# Altium PCB Lite Carrier for Mu.PcbDoc (part 6 of 15)
Units mm, origin at the board's own origin, x right, y up, seen from the top; angles counter-clockwise.
Board outline 146 x 102 mm, 20 copper layers (F.Cu, F.Mask, B.Cu, B.Mask, In1.Cu, F.SilkS, In2.Cu, B.SilkS, F.Adhes, B.Adhes, F.Paste, B.Paste, Dwgs.User, Cmts.User, Eco1.User, Eco2.User, Edge.Cuts, Margin, B.CrtYd, F.CrtYd); 254 components, 382 nets, 1258 pads, 1020 vias.
Unrouted connection lines stored in the file: 113.
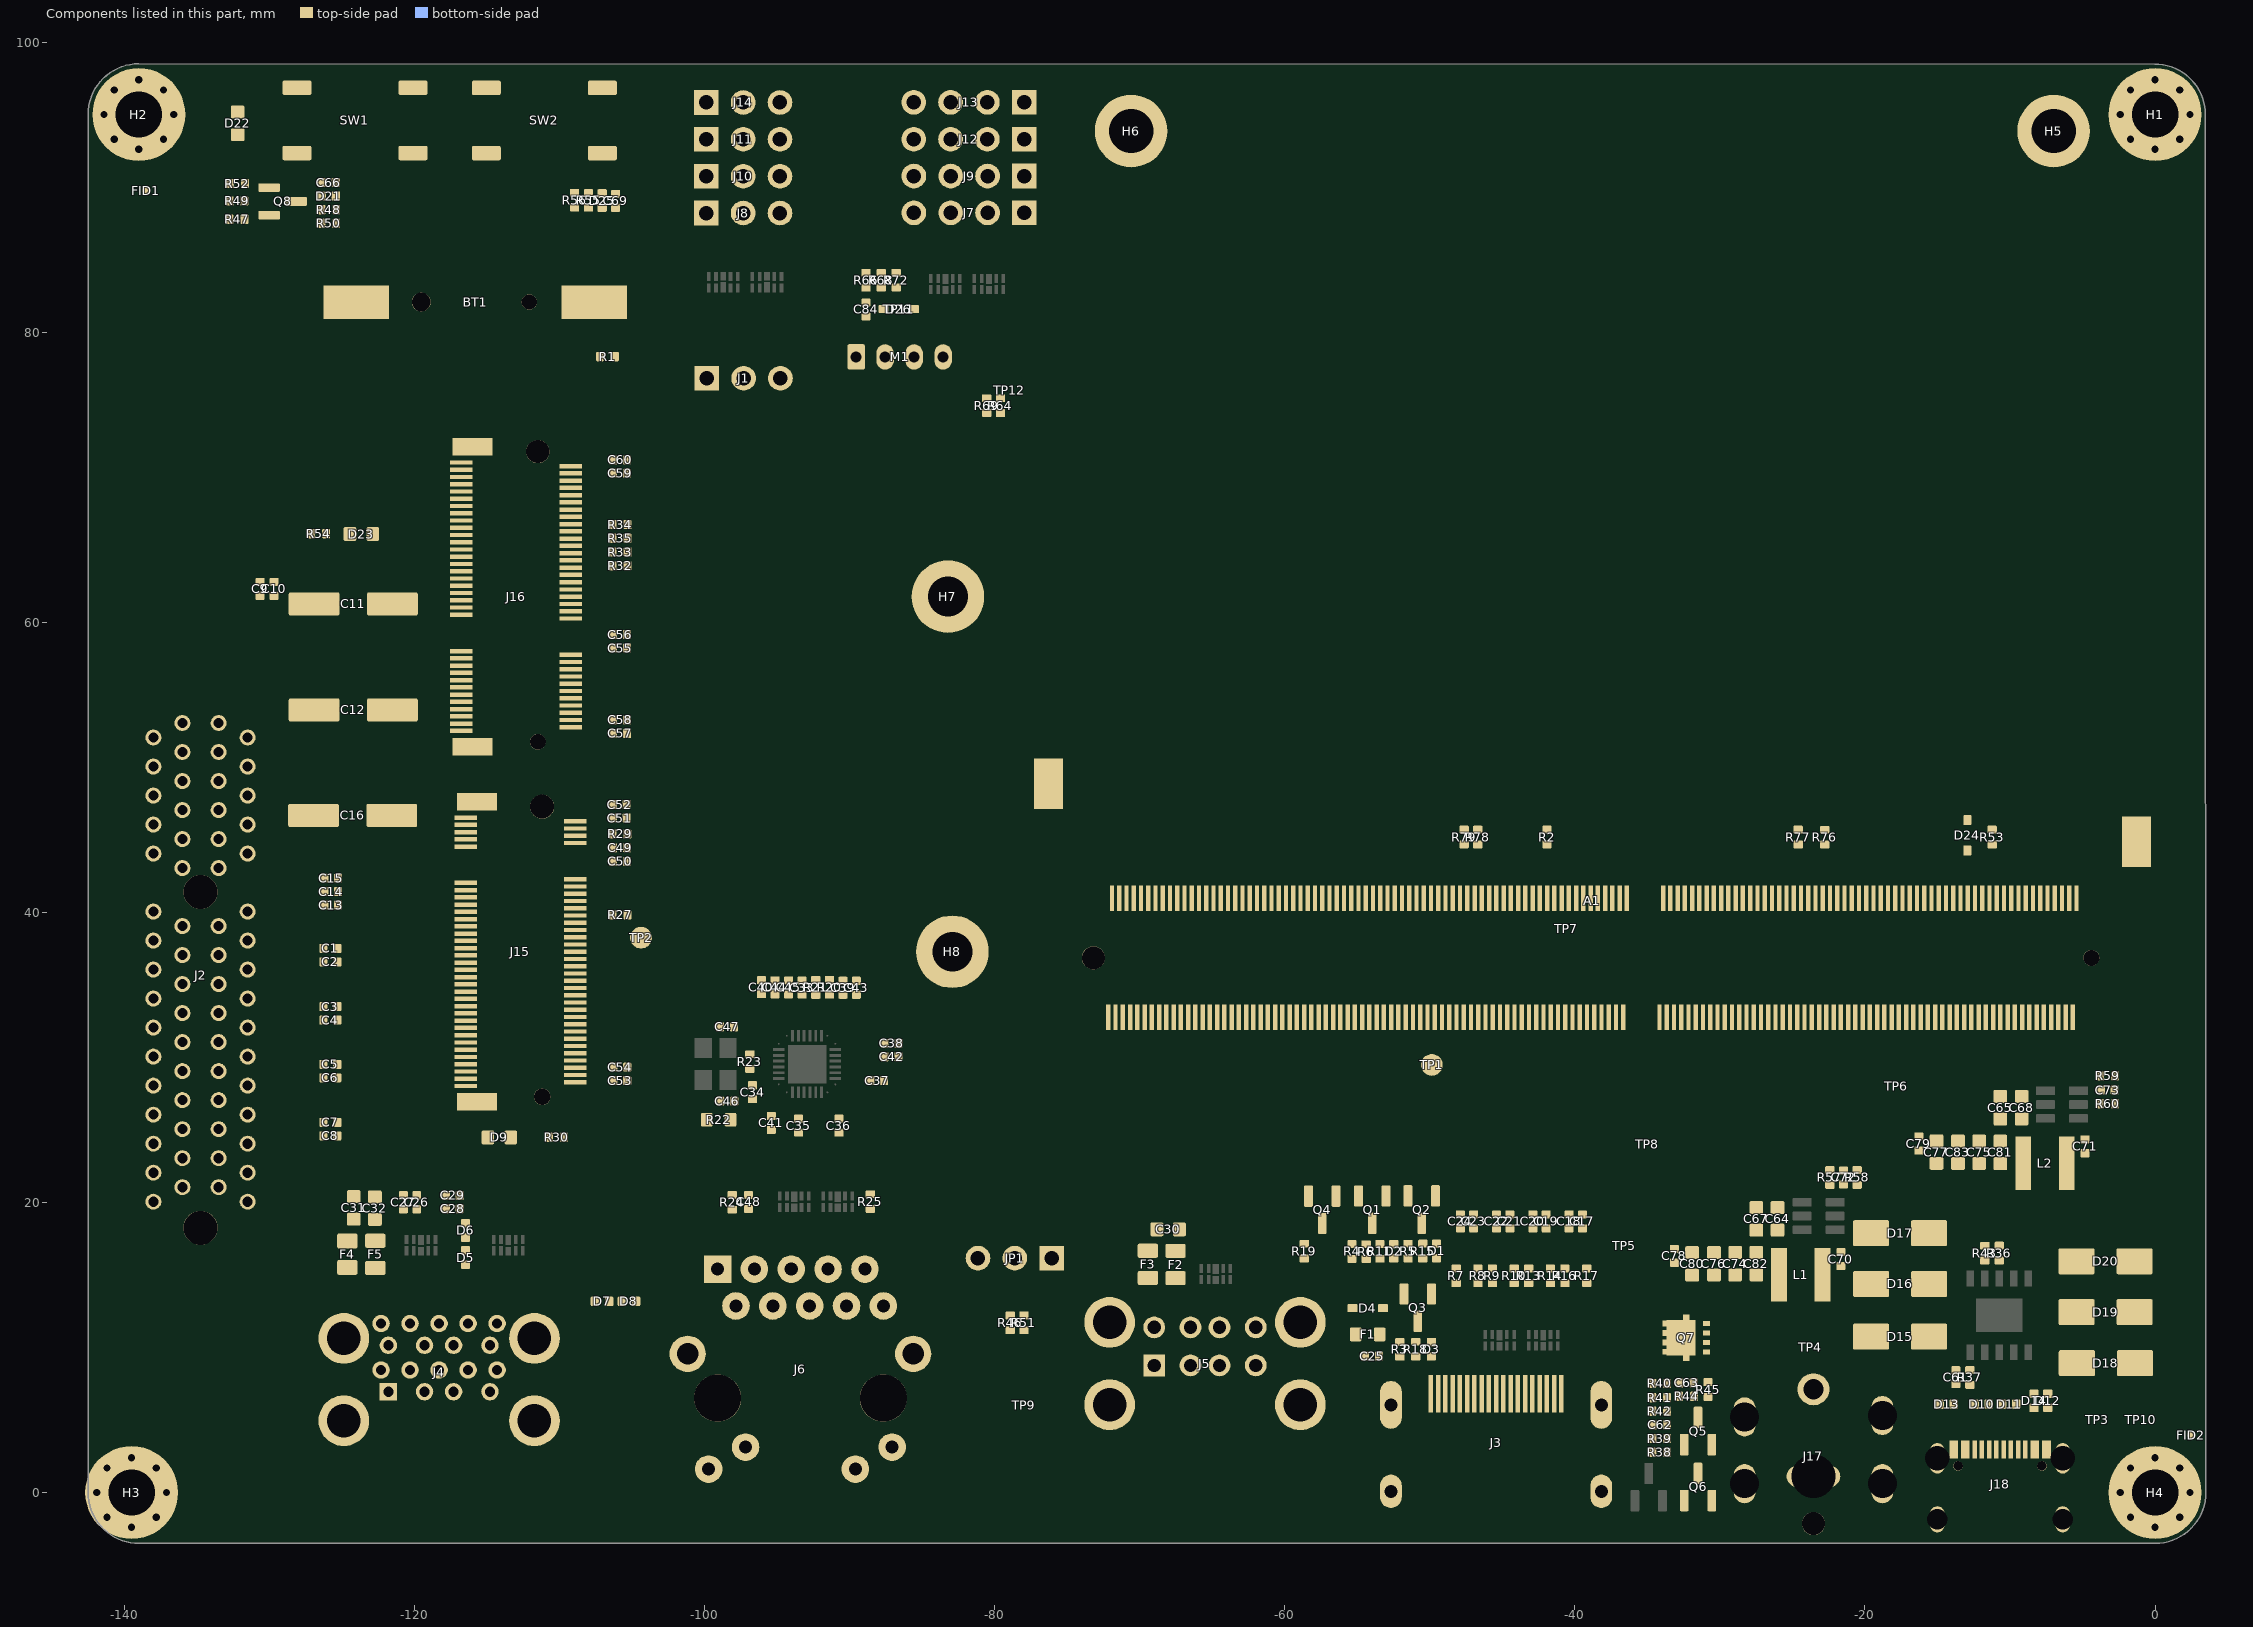
[diagram p17: the components of this part, seen from the top]

## Design rules (kind name [scope] priority, off if disabled: settings) (continued)
PolygonConnect "Polygon_F.Cu-/M.2 E&M Key/CON_PCIE_TX_0+_ConnectDirect" [IsNamedPolygon('F.Cu-/M.2 E&M Key/CON_PCIE_TX_0+')] p1089: connectstyle=Direct reliefconductorwidth=0.254 reliefentries=4 polygonreliefangle="90 Angle" airgapwidth=0.254
PolygonConnect Polygon_F.Cu-+BATT_ConnectDirect [IsNamedPolygon('F.Cu-+BATT')] p1090: connectstyle=Direct reliefconductorwidth=0.254 reliefentries=4 polygonreliefangle="90 Angle" airgapwidth=0.254
PolygonConnect Polygon_F.Cu-/USB2.0&USB3.0/CON_USB2_D_N_ConnectDirect [IsNamedPolygon('F.Cu-/USB2.0&USB3.0/CON_USB2_D_N')] p1091: connectstyle=Direct reliefconductorwidth=0.254 reliefentries=4 polygonreliefangle="90 Angle" airgapwidth=0.254
PolygonConnect "Polygon_F.Cu-/Gigabit Ethernet/GbE_PCIe_CLK+_ConnectDirect" [IsNamedPolygon('F.Cu-/Gigabit Ethernet/GbE_PCIe_CLK+')] p1092: connectstyle=Direct reliefconductorwidth=0.254 reliefentries=4 polygonreliefangle="90 Angle" airgapwidth=0.254
PolygonConnect Polygon_F.Cu-Net-(J6-PadL3)_ConnectDirect [IsNamedPolygon('F.Cu-Net-(J6-PadL3)')] p1093: connectstyle=Direct reliefconductorwidth=0.254 reliefentries=4 polygonreliefangle="90 Angle" airgapwidth=0.254
PolygonConnect Polygon_F.Cu-/USB2.0&USB3.0/CON_USB3_SSRX_P_ConnectDirect [IsNamedPolygon('F.Cu-/USB2.0&USB3.0/CON_USB3_SSRX_P')] p1094: connectstyle=Direct reliefconductorwidth=0.254 reliefentries=4 polygonreliefangle="90 Angle" airgapwidth=0.254
PolygonConnect Polygon_F.Cu-Net-(D26-A)_ConnectDirect [IsNamedPolygon('F.Cu-Net-(D26-A)')] p1095: connectstyle=Direct reliefconductorwidth=0.254 reliefentries=4 polygonreliefangle="90 Angle" airgapwidth=0.254
PolygonConnect Polygon_F.Cu-GND-27_ConnectDirect [IsNamedPolygon('F.Cu-GND-27')] p1096: connectstyle=Direct reliefconductorwidth=0.254 reliefentries=4 polygonreliefangle="90 Angle" airgapwidth=0.254
PolygonConnect "Polygon_F.Cu-/Gigabit Ethernet/MDI2-_ConnectDirect" [IsNamedPolygon('F.Cu-/Gigabit Ethernet/MDI2-')] p1097: connectstyle=Direct reliefconductorwidth=0.254 reliefentries=4 polygonreliefangle="90 Angle" airgapwidth=0.254
PolygonConnect Polygon_F.Cu-/HDMI/TMDS_D2+-2_ConnectDirect [IsNamedPolygon('F.Cu-/HDMI/TMDS_D2+-2')] p1098: connectstyle=Direct reliefconductorwidth=0.254 reliefentries=4 polygonreliefangle="90 Angle" airgapwidth=0.254
PolygonConnect Polygon_F.Cu-GND-26_ConnectDirect [IsNamedPolygon('F.Cu-GND-26')] p1099: connectstyle=Direct reliefconductorwidth=0.254 reliefentries=4 polygonreliefangle="90 Angle" airgapwidth=0.254
PolygonConnect Polygon_F.Cu-/USB2.0&USB3.0/CON_USB3_D_P-1_ConnectDirect [IsNamedPolygon('F.Cu-/USB2.0&USB3.0/CON_USB3_D_P-1')] p1100: connectstyle=Direct reliefconductorwidth=0.254 reliefentries=4 polygonreliefangle="90 Angle" airgapwidth=0.254
PolygonConnect Polygon_F.Cu-/GPIO/I2C3_SCL-1_ConnectDirect [IsNamedPolygon('F.Cu-/GPIO/I2C3_SCL-1')] p1101: connectstyle=Direct reliefconductorwidth=0.254 reliefentries=4 polygonreliefangle="90 Angle" airgapwidth=0.254
PolygonConnect "Polygon_F.Cu-/Gigabit Ethernet/MDI0+_ConnectDirect" [IsNamedPolygon('F.Cu-/Gigabit Ethernet/MDI0+')] p1102: connectstyle=Direct reliefconductorwidth=0.254 reliefentries=4 polygonreliefangle="90 Angle" airgapwidth=0.254
PolygonConnect Polygon_F.Cu-/HDMI/HPD-2_ConnectDirect [IsNamedPolygon('F.Cu-/HDMI/HPD-2')] p1103: connectstyle=Direct reliefconductorwidth=0.254 reliefentries=4 polygonreliefangle="90 Angle" airgapwidth=0.254
PolygonConnect Polygon_F.Cu-Net-(U14-VBUS)-1_ConnectDirect [IsNamedPolygon('F.Cu-Net-(U14-VBUS)-1')] p1104: connectstyle=Direct reliefconductorwidth=0.254 reliefentries=4 polygonreliefangle="90 Angle" airgapwidth=0.254
PolygonConnect "Polygon_F.Cu-/LattePanda Module/HSIO_9_TX-_ConnectDirect" [IsNamedPolygon('F.Cu-/LattePanda Module/HSIO_9_TX-')] p1105: connectstyle=Direct reliefconductorwidth=0.254 reliefentries=4 polygonreliefangle="90 Angle" airgapwidth=0.254
PolygonConnect Polygon_F.Cu-GND-25_ConnectDirect [IsNamedPolygon('F.Cu-GND-25')] p1106: connectstyle=Direct reliefconductorwidth=0.254 reliefentries=4 polygonreliefangle="90 Angle" airgapwidth=0.254
PolygonConnect Polygon_F.Cu-/~{PWR_LED}{slash}~{PSON}_ConnectDirect [IsNamedPolygon('F.Cu-/~{PWR_LED}{slash}~{PSON}')] p1107: connectstyle=Direct reliefconductorwidth=0.254 reliefentries=4 polygonreliefangle="90 Angle" airgapwidth=0.254
PolygonConnect Polygon_F.Cu-GND-24_ConnectDirect [IsNamedPolygon('F.Cu-GND-24')] p1108: connectstyle=Direct reliefconductorwidth=0.254 reliefentries=4 polygonreliefangle="90 Angle" airgapwidth=0.254
PolygonConnect Polygon_F.Cu-/PSU/PWR_C_D-_ConnectDirect [IsNamedPolygon('F.Cu-/PSU/PWR_C_D-')] p1109: connectstyle=Direct reliefconductorwidth=0.254 reliefentries=4 polygonreliefangle="90 Angle" airgapwidth=0.254
PolygonConnect Polygon_F.Cu-+15V_ConnectDirect [IsNamedPolygon('F.Cu-+15V')] p1110: connectstyle=Direct reliefconductorwidth=0.254 reliefentries=4 polygonreliefangle="90 Angle" airgapwidth=0.254
PolygonConnect Polygon_F.Cu-GND-23_ConnectDirect [IsNamedPolygon('F.Cu-GND-23')] p1111: connectstyle=Direct reliefconductorwidth=0.254 reliefentries=4 polygonreliefangle="90 Angle" airgapwidth=0.254
PolygonConnect Polygon_F.Cu-/HDMI/TMDS_D2+-1_ConnectDirect [IsNamedPolygon('F.Cu-/HDMI/TMDS_D2+-1')] p1112: connectstyle=Direct reliefconductorwidth=0.254 reliefentries=4 polygonreliefangle="90 Angle" airgapwidth=0.254
PolygonConnect Polygon_F.Cu-VPullup-1_ConnectDirect [IsNamedPolygon('F.Cu-VPullup-1')] p1113: connectstyle=Direct reliefconductorwidth=0.254 reliefentries=4 polygonreliefangle="90 Angle" airgapwidth=0.254
PolygonConnect Polygon_F.Cu-Net-(U13-REF)-1_ConnectDirect [IsNamedPolygon('F.Cu-Net-(U13-REF)-1')] p1114: connectstyle=Direct reliefconductorwidth=0.254 reliefentries=4 polygonreliefangle="90 Angle" airgapwidth=0.254
PolygonConnect Polygon_F.Cu-Net-(J16-SUSCLK)_ConnectDirect [IsNamedPolygon('F.Cu-Net-(J16-SUSCLK)')] p1115: connectstyle=Direct reliefconductorwidth=0.254 reliefentries=4 polygonreliefangle="90 Angle" airgapwidth=0.254
PolygonConnect Polygon_F.Cu-+1V0-3_ConnectDirect [IsNamedPolygon('F.Cu-+1V0-3')] p1116: connectstyle=Direct reliefconductorwidth=0.254 reliefentries=4 polygonreliefangle="90 Angle" airgapwidth=0.254
PolygonConnect Polygon_F.Cu-/PSU/CC2-1_ConnectDirect [IsNamedPolygon('F.Cu-/PSU/CC2-1')] p1117: connectstyle=Direct reliefconductorwidth=0.254 reliefentries=4 polygonreliefangle="90 Angle" airgapwidth=0.254
PolygonConnect Polygon_F.Cu-Net-(Q4-D)_ConnectDirect [IsNamedPolygon('F.Cu-Net-(Q4-D)')] p1118: connectstyle=Direct reliefconductorwidth=0.254 reliefentries=4 polygonreliefangle="90 Angle" airgapwidth=0.254
PolygonConnect Polygon_F.Cu-+3V3-16_ConnectDirect [IsNamedPolygon('F.Cu-+3V3-16')] p1119: connectstyle=Direct reliefconductorwidth=0.254 reliefentries=4 polygonreliefangle="90 Angle" airgapwidth=0.254
PolygonConnect Polygon_F.Cu-/HDMI/TMDS_D1--1_ConnectDirect [IsNamedPolygon('F.Cu-/HDMI/TMDS_D1--1')] p1120: connectstyle=Direct reliefconductorwidth=0.254 reliefentries=4 polygonreliefangle="90 Angle" airgapwidth=0.254
PolygonConnect Polygon_F.Cu-/GPIO/SOC_UART2_RX-1_ConnectDirect [IsNamedPolygon('F.Cu-/GPIO/SOC_UART2_RX-1')] p1121: connectstyle=Direct reliefconductorwidth=0.254 reliefentries=4 polygonreliefangle="90 Angle" airgapwidth=0.254
PolygonConnect Polygon_F.Cu-Net-(Q5-G)_ConnectDirect [IsNamedPolygon('F.Cu-Net-(Q5-G)')] p1122: connectstyle=Direct reliefconductorwidth=0.254 reliefentries=4 polygonreliefangle="90 Angle" airgapwidth=0.254
PolygonConnect Polygon_F.Cu-+3V3-15_ConnectDirect [IsNamedPolygon('F.Cu-+3V3-15')] p1123: connectstyle=Direct reliefconductorwidth=0.254 reliefentries=4 polygonreliefangle="90 Angle" airgapwidth=0.254
PolygonConnect Polygon_F.Cu-/HDMI/TMDS_CK+_ConnectDirect [IsNamedPolygon('F.Cu-/HDMI/TMDS_CK+')] p1124: connectstyle=Direct reliefconductorwidth=0.254 reliefentries=4 polygonreliefangle="90 Angle" airgapwidth=0.254
PolygonConnect "Polygon_F.Cu-/LattePanda Module/~{PWR_SW}-1_ConnectDirect" [IsNamedPolygon('F.Cu-/LattePanda Module/~{PWR_SW}-1')] p1125: connectstyle=Direct reliefconductorwidth=0.254 reliefentries=4 polygonreliefangle="90 Angle" airgapwidth=0.254
PolygonConnect Polygon_F.Cu-/GPIO/I2C3_SCL_ConnectDirect [IsNamedPolygon('F.Cu-/GPIO/I2C3_SCL')] p1126: connectstyle=Direct reliefconductorwidth=0.254 reliefentries=4 polygonreliefangle="90 Angle" airgapwidth=0.254
PolygonConnect Polygon_F.Cu-/GPIO/I2C4_SCL_ConnectDirect [IsNamedPolygon('F.Cu-/GPIO/I2C4_SCL')] p1127: connectstyle=Direct reliefconductorwidth=0.254 reliefentries=4 polygonreliefangle="90 Angle" airgapwidth=0.254
PolygonConnect Polygon_F.Cu-+3V3-14_ConnectDirect [IsNamedPolygon('F.Cu-+3V3-14')] p1128: connectstyle=Direct reliefconductorwidth=0.254 reliefentries=4 polygonreliefangle="90 Angle" airgapwidth=0.254
PolygonConnect Polygon_F.Cu-/HDMI/TMDS_D1-_ConnectDirect [IsNamedPolygon('F.Cu-/HDMI/TMDS_D1-')] p1129: connectstyle=Direct reliefconductorwidth=0.254 reliefentries=4 polygonreliefangle="90 Angle" airgapwidth=0.254
PolygonConnect Polygon_F.Cu-/PSU/CC2_ConnectDirect [IsNamedPolygon('F.Cu-/PSU/CC2')] p1130: connectstyle=Direct reliefconductorwidth=0.254 reliefentries=4 polygonreliefangle="90 Angle" airgapwidth=0.254
PolygonConnect Polygon_F.Cu-+3V3-13_ConnectDirect [IsNamedPolygon('F.Cu-+3V3-13')] p1131: connectstyle=Direct reliefconductorwidth=0.254 reliefentries=4 polygonreliefangle="90 Angle" airgapwidth=0.254
PolygonConnect Polygon_F.Cu-+3V3-12_ConnectDirect [IsNamedPolygon('F.Cu-+3V3-12')] p1132: connectstyle=Direct reliefconductorwidth=0.254 reliefentries=4 polygonreliefangle="90 Angle" airgapwidth=0.254
PolygonConnect Polygon_F.Cu-+1V0-2_ConnectDirect [IsNamedPolygon('F.Cu-+1V0-2')] p1133: connectstyle=Direct reliefconductorwidth=0.254 reliefentries=4 polygonreliefangle="90 Angle" airgapwidth=0.254
PolygonConnect Polygon_F.Cu-/GPIO/SOC_UART2_RX_ConnectDirect [IsNamedPolygon('F.Cu-/GPIO/SOC_UART2_RX')] p1134: connectstyle=Direct reliefconductorwidth=0.254 reliefentries=4 polygonreliefangle="90 Angle" airgapwidth=0.254
PolygonConnect Polygon_F.Cu-/USB2.0&USB3.0/CON_USB1_D_N-3_ConnectDirect [IsNamedPolygon('F.Cu-/USB2.0&USB3.0/CON_USB1_D_N-3')] p1135: connectstyle=Direct reliefconductorwidth=0.254 reliefentries=4 polygonreliefangle="90 Angle" airgapwidth=0.254
PolygonConnect Polygon_F.Cu-GND-22_ConnectDirect [IsNamedPolygon('F.Cu-GND-22')] p1136: connectstyle=Direct reliefconductorwidth=0.254 reliefentries=4 polygonreliefangle="90 Angle" airgapwidth=0.254
PolygonConnect Polygon_F.Cu-/~{PLT_RST}-3_ConnectDirect [IsNamedPolygon('F.Cu-/~{PLT_RST}-3')] p1137: connectstyle=Direct reliefconductorwidth=0.254 reliefentries=4 polygonreliefangle="90 Angle" airgapwidth=0.254
PolygonConnect Polygon_F.Cu-Net-(Q1-D)_ConnectDirect [IsNamedPolygon('F.Cu-Net-(Q1-D)')] p1138: connectstyle=Direct reliefconductorwidth=0.254 reliefentries=4 polygonreliefangle="90 Angle" airgapwidth=0.254
PolygonConnect "Polygon_F.Cu-/LattePanda Module/HSIO_3_RX-_ConnectDirect" [IsNamedPolygon('F.Cu-/LattePanda Module/HSIO_3_RX-')] p1139: connectstyle=Direct reliefconductorwidth=0.254 reliefentries=4 polygonreliefangle="90 Angle" airgapwidth=0.254
PolygonConnect Polygon_F.Cu-GND-21_ConnectDirect [IsNamedPolygon('F.Cu-GND-21')] p1140: connectstyle=Direct reliefconductorwidth=0.254 reliefentries=4 polygonreliefangle="90 Angle" airgapwidth=0.254
PolygonConnect "Polygon_F.Cu-/LattePanda Module/HSIO_8_TX+_ConnectDirect" [IsNamedPolygon('F.Cu-/LattePanda Module/HSIO_8_TX+')] p1141: connectstyle=Direct reliefconductorwidth=0.254 reliefentries=4 polygonreliefangle="90 Angle" airgapwidth=0.254
PolygonConnect "Polygon_F.Cu-/LattePanda Module/USB_2_P7-_ConnectDirect" [IsNamedPolygon('F.Cu-/LattePanda Module/USB_2_P7-')] p1142: connectstyle=Direct reliefconductorwidth=0.254 reliefentries=4 polygonreliefangle="90 Angle" airgapwidth=0.254
PolygonConnect Polygon_F.Cu-+12V_ConnectDirect [IsNamedPolygon('F.Cu-+12V')] p1143: connectstyle=Direct reliefconductorwidth=0.254 reliefentries=4 polygonreliefangle="90 Angle" airgapwidth=0.254
PolygonConnect Polygon_F.Cu-GND-20_ConnectDirect [IsNamedPolygon('F.Cu-GND-20')] p1144: connectstyle=Direct reliefconductorwidth=0.254 reliefentries=4 polygonreliefangle="90 Angle" airgapwidth=0.254
PolygonConnect Polygon_F.Cu-/HDMI/TMDS_D0+_ConnectDirect [IsNamedPolygon('F.Cu-/HDMI/TMDS_D0+')] p1145: connectstyle=Direct reliefconductorwidth=0.254 reliefentries=4 polygonreliefangle="90 Angle" airgapwidth=0.254
PolygonConnect Polygon_F.Cu-Net-(U14-VBUS)_ConnectDirect [IsNamedPolygon('F.Cu-Net-(U14-VBUS)')] p1146: connectstyle=Direct reliefconductorwidth=0.254 reliefentries=4 polygonreliefangle="90 Angle" airgapwidth=0.254
PolygonConnect Polygon_F.Cu-Net-(Q7-G)-2_ConnectDirect [IsNamedPolygon('F.Cu-Net-(Q7-G)-2')] p1147: connectstyle=Direct reliefconductorwidth=0.254 reliefentries=4 polygonreliefangle="90 Angle" airgapwidth=0.254
PolygonConnect Polygon_F.Cu-+3V3-11_ConnectDirect [IsNamedPolygon('F.Cu-+3V3-11')] p1148: connectstyle=Direct reliefconductorwidth=0.254 reliefentries=4 polygonreliefangle="90 Angle" airgapwidth=0.254
PolygonConnect Polygon_F.Cu-+3V3-10_ConnectDirect [IsNamedPolygon('F.Cu-+3V3-10')] p1149: connectstyle=Direct reliefconductorwidth=0.254 reliefentries=4 polygonreliefangle="90 Angle" airgapwidth=0.254
PolygonConnect Polygon_F.Cu-GND-19_ConnectDirect [IsNamedPolygon('F.Cu-GND-19')] p1150: connectstyle=Direct reliefconductorwidth=0.254 reliefentries=4 polygonreliefangle="90 Angle" airgapwidth=0.254
PolygonConnect Polygon_F.Cu-Net-(U16-BOOST)_ConnectDirect [IsNamedPolygon('F.Cu-Net-(U16-BOOST)')] p1151: connectstyle=Direct reliefconductorwidth=0.254 reliefentries=4 polygonreliefangle="90 Angle" airgapwidth=0.254
PolygonConnect Polygon_F.Cu-+3V3-9_ConnectDirect [IsNamedPolygon('F.Cu-+3V3-9')] p1152: connectstyle=Direct reliefconductorwidth=0.254 reliefentries=4 polygonreliefangle="90 Angle" airgapwidth=0.254
PolygonConnect Polygon_F.Cu-Net-(Q7-G)-1_ConnectDirect [IsNamedPolygon('F.Cu-Net-(Q7-G)-1')] p1153: connectstyle=Direct reliefconductorwidth=0.254 reliefentries=4 polygonreliefangle="90 Angle" airgapwidth=0.254
PolygonConnect Polygon_F.Cu-/GPIO/SOC_UART1_RX_ConnectDirect [IsNamedPolygon('F.Cu-/GPIO/SOC_UART1_RX')] p1154: connectstyle=Direct reliefconductorwidth=0.254 reliefentries=4 polygonreliefangle="90 Angle" airgapwidth=0.254
PolygonConnect Polygon_F.Cu-/HDMI/DDI_B_TX0+_ConnectDirect [IsNamedPolygon('F.Cu-/HDMI/DDI_B_TX0+')] p1155: connectstyle=Direct reliefconductorwidth=0.254 reliefentries=4 polygonreliefangle="90 Angle" airgapwidth=0.254
PolygonConnect Polygon_F.Cu-+3V3-8_ConnectDirect [IsNamedPolygon('F.Cu-+3V3-8')] p1156: connectstyle=Direct reliefconductorwidth=0.254 reliefentries=4 polygonreliefangle="90 Angle" airgapwidth=0.254
PolygonConnect Polygon_F.Cu-/USB2.0&USB3.0/CON_USB4_D_P_ConnectDirect [IsNamedPolygon('F.Cu-/USB2.0&USB3.0/CON_USB4_D_P')] p1157: connectstyle=Direct reliefconductorwidth=0.254 reliefentries=4 polygonreliefangle="90 Angle" airgapwidth=0.254
PolygonConnect Polygon_F.Cu-/HDMI/DDI_B_TX1+_ConnectDirect [IsNamedPolygon('F.Cu-/HDMI/DDI_B_TX1+')] p1158: connectstyle=Direct reliefconductorwidth=0.254 reliefentries=4 polygonreliefangle="90 Angle" airgapwidth=0.254
PolygonConnect Polygon_F.Cu-+3V3-7_ConnectDirect [IsNamedPolygon('F.Cu-+3V3-7')] p1159: connectstyle=Direct reliefconductorwidth=0.254 reliefentries=4 polygonreliefangle="90 Angle" airgapwidth=0.254
PolygonConnect Polygon_F.Cu-/USB2.0&USB3.0/CON_USB1_D_N-2_ConnectDirect [IsNamedPolygon('F.Cu-/USB2.0&USB3.0/CON_USB1_D_N-2')] p1160: connectstyle=Direct reliefconductorwidth=0.254 reliefentries=4 polygonreliefangle="90 Angle" airgapwidth=0.254
PolygonConnect Polygon_F.Cu-GND-18_ConnectDirect [IsNamedPolygon('F.Cu-GND-18')] p1161: connectstyle=Direct reliefconductorwidth=0.254 reliefentries=4 polygonreliefangle="90 Angle" airgapwidth=0.254
PolygonConnect "Polygon_F.Cu-/LattePanda Module/HSIO_0_TX+_ConnectDirect" [IsNamedPolygon('F.Cu-/LattePanda Module/HSIO_0_TX+')] p1162: connectstyle=Direct reliefconductorwidth=0.254 reliefentries=4 polygonreliefangle="90 Angle" airgapwidth=0.254
PolygonConnect Polygon_F.Cu-/GPIO/SOC_UART2_TX_ConnectDirect [IsNamedPolygon('F.Cu-/GPIO/SOC_UART2_TX')] p1163: connectstyle=Direct reliefconductorwidth=0.254 reliefentries=4 polygonreliefangle="90 Angle" airgapwidth=0.254
PolygonConnect Polygon_F.Cu-Net-(A1-SIO_UART_RX)_ConnectDirect [IsNamedPolygon('F.Cu-Net-(A1-SIO_UART_RX)')] p1164: connectstyle=Direct reliefconductorwidth=0.254 reliefentries=4 polygonreliefangle="90 Angle" airgapwidth=0.254
PolygonConnect Polygon_F.Cu-/PSU/PWR_C_D+_ConnectDirect [IsNamedPolygon('F.Cu-/PSU/PWR_C_D+')] p1165: connectstyle=Direct reliefconductorwidth=0.254 reliefentries=4 polygonreliefangle="90 Angle" airgapwidth=0.254
PolygonConnect Polygon_F.Cu-+1V0-1_ConnectDirect [IsNamedPolygon('F.Cu-+1V0-1')] p1166: connectstyle=Direct reliefconductorwidth=0.254 reliefentries=4 polygonreliefangle="90 Angle" airgapwidth=0.254
PolygonConnect Polygon_F.Cu-GND-17_ConnectDirect [IsNamedPolygon('F.Cu-GND-17')] p1167: connectstyle=Direct reliefconductorwidth=0.254 reliefentries=4 polygonreliefangle="90 Angle" airgapwidth=0.254
PolygonConnect Polygon_F.Cu-/USB2.0&USB3.0/CON_USB3_D_P_ConnectDirect [IsNamedPolygon('F.Cu-/USB2.0&USB3.0/CON_USB3_D_P')] p1168: connectstyle=Direct reliefconductorwidth=0.254 reliefentries=4 polygonreliefangle="90 Angle" airgapwidth=0.254
PolygonConnect Polygon_F.Cu-Net-(U14-VDD)-1_ConnectDirect [IsNamedPolygon('F.Cu-Net-(U14-VDD)-1')] p1169: connectstyle=Direct reliefconductorwidth=0.254 reliefentries=4 polygonreliefangle="90 Angle" airgapwidth=0.254
PolygonConnect Polygon_F.Cu-+3V3-6_ConnectDirect [IsNamedPolygon('F.Cu-+3V3-6')] p1170: connectstyle=Direct reliefconductorwidth=0.254 reliefentries=4 polygonreliefangle="90 Angle" airgapwidth=0.254
PolygonConnect Polygon_F.Cu-/USB2.0&USB3.0/CON_USB3_SSTX_P_ConnectDirect [IsNamedPolygon('F.Cu-/USB2.0&USB3.0/CON_USB3_SSTX_P')] p1171: connectstyle=Direct reliefconductorwidth=0.254 reliefentries=4 polygonreliefangle="90 Angle" airgapwidth=0.254
PolygonConnect Polygon_F.Cu-Net-(J5-VBUS1)_ConnectDirect [IsNamedPolygon('F.Cu-Net-(J5-VBUS1)')] p1172: connectstyle=Direct reliefconductorwidth=0.254 reliefentries=4 polygonreliefangle="90 Angle" airgapwidth=0.254
PolygonConnect Polygon_F.Cu-+3V3-5_ConnectDirect [IsNamedPolygon('F.Cu-+3V3-5')] p1173: connectstyle=Direct reliefconductorwidth=0.254 reliefentries=4 polygonreliefangle="90 Angle" airgapwidth=0.254
PolygonConnect "Polygon_F.Cu-/LattePanda Module/HSIO_3_RX+_ConnectDirect" [IsNamedPolygon('F.Cu-/LattePanda Module/HSIO_3_RX+')] p1174: connectstyle=Direct reliefconductorwidth=0.254 reliefentries=4 polygonreliefangle="90 Angle" airgapwidth=0.254
PolygonConnect Polygon_F.Cu-/USB2.0&USB3.0/CON_USB1_D_N-1_ConnectDirect [IsNamedPolygon('F.Cu-/USB2.0&USB3.0/CON_USB1_D_N-1')] p1175: connectstyle=Direct reliefconductorwidth=0.254 reliefentries=4 polygonreliefangle="90 Angle" airgapwidth=0.254
PolygonConnect Polygon_F.Cu-Net-(J15-SUSCLK)_ConnectDirect [IsNamedPolygon('F.Cu-Net-(J15-SUSCLK)')] p1176: connectstyle=Direct reliefconductorwidth=0.254 reliefentries=4 polygonreliefangle="90 Angle" airgapwidth=0.254
PolygonConnect Polygon_F.Cu-/HDMI/TMDS_CK-_ConnectDirect [IsNamedPolygon('F.Cu-/HDMI/TMDS_CK-')] p1177: connectstyle=Direct reliefconductorwidth=0.254 reliefentries=4 polygonreliefangle="90 Angle" airgapwidth=0.254
PolygonConnect Polygon_F.Cu-/USB2.0&USB3.0/CON_USB1_D_N_ConnectDirect [IsNamedPolygon('F.Cu-/USB2.0&USB3.0/CON_USB1_D_N')] p1178: connectstyle=Direct reliefconductorwidth=0.254 reliefentries=4 polygonreliefangle="90 Angle" airgapwidth=0.254
PolygonConnect Polygon_F.Cu-GND-16_ConnectDirect [IsNamedPolygon('F.Cu-GND-16')] p1179: connectstyle=Direct reliefconductorwidth=0.254 reliefentries=4 polygonreliefangle="90 Angle" airgapwidth=0.254
PolygonConnect "Polygon_F.Cu-/LattePanda Module/SUSCLK_WIFI-1_ConnectDirect" [IsNamedPolygon('F.Cu-/LattePanda Module/SUSCLK_WIFI-1')] p1180: connectstyle=Direct reliefconductorwidth=0.254 reliefentries=4 polygonreliefangle="90 Angle" airgapwidth=0.254
PolygonConnect "Polygon_F.Cu-/Gigabit Ethernet/LED1_1000_ConnectDirect" [IsNamedPolygon('F.Cu-/Gigabit Ethernet/LED1_1000')] p1181: connectstyle=Direct reliefconductorwidth=0.254 reliefentries=4 polygonreliefangle="90 Angle" airgapwidth=0.254
PolygonConnect Polygon_F.Cu-/Fan_Temp/FAN_1_TAC_ConnectDirect [IsNamedPolygon('F.Cu-/Fan_Temp/FAN_1_TAC')] p1182: connectstyle=Direct reliefconductorwidth=0.254 reliefentries=4 polygonreliefangle="90 Angle" airgapwidth=0.254
PolygonConnect "Polygon_F.Cu-/Gigabit Ethernet/HSI-_ConnectDirect" [IsNamedPolygon('F.Cu-/Gigabit Ethernet/HSI-')] p1183: connectstyle=Direct reliefconductorwidth=0.254 reliefentries=4 polygonreliefangle="90 Angle" airgapwidth=0.254
PolygonConnect Polygon_F.Cu-GND-15_ConnectDirect [IsNamedPolygon('F.Cu-GND-15')] p1184: connectstyle=Direct reliefconductorwidth=0.254 reliefentries=4 polygonreliefangle="90 Angle" airgapwidth=0.254
PolygonConnect Polygon_F.Cu-GND-14_ConnectDirect [IsNamedPolygon('F.Cu-GND-14')] p1185: connectstyle=Direct reliefconductorwidth=0.254 reliefentries=4 polygonreliefangle="90 Angle" airgapwidth=0.254
PolygonConnect "Polygon_F.Cu-/LattePanda Module/HSIO_2_RX+_ConnectDirect" [IsNamedPolygon('F.Cu-/LattePanda Module/HSIO_2_RX+')] p1186: connectstyle=Direct reliefconductorwidth=0.254 reliefentries=4 polygonreliefangle="90 Angle" airgapwidth=0.254
PolygonConnect Polygon_F.Cu-+3V3-4_ConnectDirect [IsNamedPolygon('F.Cu-+3V3-4')] p1187: connectstyle=Direct reliefconductorwidth=0.254 reliefentries=4 polygonreliefangle="90 Angle" airgapwidth=0.254
PolygonConnect Polygon_F.Cu-/HDMI/TMDS_D2+_ConnectDirect [IsNamedPolygon('F.Cu-/HDMI/TMDS_D2+')] p1188: connectstyle=Direct reliefconductorwidth=0.254 reliefentries=4 polygonreliefangle="90 Angle" airgapwidth=0.254
PolygonConnect Polygon_F.Cu-+3V3-3_ConnectDirect [IsNamedPolygon('F.Cu-+3V3-3')] p1189: connectstyle=Direct reliefconductorwidth=0.254 reliefentries=4 polygonreliefangle="90 Angle" airgapwidth=0.254
PolygonConnect Polygon_F.Cu-GND-13_ConnectDirect [IsNamedPolygon('F.Cu-GND-13')] p1190: connectstyle=Direct reliefconductorwidth=0.254 reliefentries=4 polygonreliefangle="90 Angle" airgapwidth=0.254
PolygonConnect Polygon_F.Cu-GND-12_ConnectDirect [IsNamedPolygon('F.Cu-GND-12')] p1191: connectstyle=Direct reliefconductorwidth=0.254 reliefentries=4 polygonreliefangle="90 Angle" airgapwidth=0.254
PolygonConnect Polygon_F.Cu-GND-11_ConnectDirect [IsNamedPolygon('F.Cu-GND-11')] p1192: connectstyle=Direct reliefconductorwidth=0.254 reliefentries=4 polygonreliefangle="90 Angle" airgapwidth=0.254
PolygonConnect Polygon_F.Cu-GND-10_ConnectDirect [IsNamedPolygon('F.Cu-GND-10')] p1193: connectstyle=Direct reliefconductorwidth=0.254 reliefentries=4 polygonreliefangle="90 Angle" airgapwidth=0.254
PolygonConnect Polygon_F.Cu-Net-(U6-CKXTAL2)_ConnectDirect [IsNamedPolygon('F.Cu-Net-(U6-CKXTAL2)')] p1194: connectstyle=Direct reliefconductorwidth=0.254 reliefentries=4 polygonreliefangle="90 Angle" airgapwidth=0.254
PolygonConnect Polygon_F.Cu-VPullup_ConnectDirect [IsNamedPolygon('F.Cu-VPullup')] p1195: connectstyle=Direct reliefconductorwidth=0.254 reliefentries=4 polygonreliefangle="90 Angle" airgapwidth=0.254
PolygonConnect Polygon_F.Cu-+3V3-2_ConnectDirect [IsNamedPolygon('F.Cu-+3V3-2')] p1196: connectstyle=Direct reliefconductorwidth=0.254 reliefentries=4 polygonreliefangle="90 Angle" airgapwidth=0.254
PolygonConnect Polygon_F.Cu-GND-9_ConnectDirect [IsNamedPolygon('F.Cu-GND-9')] p1197: connectstyle=Direct reliefconductorwidth=0.254 reliefentries=4 polygonreliefangle="90 Angle" airgapwidth=0.254
PolygonConnect Polygon_F.Cu-+3V3-1_ConnectDirect [IsNamedPolygon('F.Cu-+3V3-1')] p1198: connectstyle=Direct reliefconductorwidth=0.254 reliefentries=4 polygonreliefangle="90 Angle" airgapwidth=0.254
PolygonConnect Polygon_F.Cu-GND-8_ConnectDirect [IsNamedPolygon('F.Cu-GND-8')] p1199: connectstyle=Direct reliefconductorwidth=0.254 reliefentries=4 polygonreliefangle="90 Angle" airgapwidth=0.254
PolygonConnect Polygon_F.Cu-/HDMI/HPD-1_ConnectDirect [IsNamedPolygon('F.Cu-/HDMI/HPD-1')] p1200: connectstyle=Direct reliefconductorwidth=0.254 reliefentries=4 polygonreliefangle="90 Angle" airgapwidth=0.254
PolygonConnect Polygon_F.Cu-GND-7_ConnectDirect [IsNamedPolygon('F.Cu-GND-7')] p1201: connectstyle=Direct reliefconductorwidth=0.254 reliefentries=4 polygonreliefangle="90 Angle" airgapwidth=0.254
PolygonConnect Polygon_F.Cu-/GPIO/I2C5_SCL-1_ConnectDirect [IsNamedPolygon('F.Cu-/GPIO/I2C5_SCL-1')] p1202: connectstyle=Direct reliefconductorwidth=0.254 reliefentries=4 polygonreliefangle="90 Angle" airgapwidth=0.254
PolygonConnect Polygon_F.Cu-/~{PLT_RST}-2_ConnectDirect [IsNamedPolygon('F.Cu-/~{PLT_RST}-2')] p1203: connectstyle=Direct reliefconductorwidth=0.254 reliefentries=4 polygonreliefangle="90 Angle" airgapwidth=0.254
PolygonConnect Polygon_F.Cu-/~{PLT_RST}-1_ConnectDirect [IsNamedPolygon('F.Cu-/~{PLT_RST}-1')] p1204: connectstyle=Direct reliefconductorwidth=0.254 reliefentries=4 polygonreliefangle="90 Angle" airgapwidth=0.254
PolygonConnect Polygon_F.Cu-GND-6_ConnectDirect [IsNamedPolygon('F.Cu-GND-6')] p1205: connectstyle=Direct reliefconductorwidth=0.254 reliefentries=4 polygonreliefangle="90 Angle" airgapwidth=0.254
PolygonConnect Polygon_F.Cu-Net-(A1-TCP1_HPD)_ConnectDirect [IsNamedPolygon('F.Cu-Net-(A1-TCP1_HPD)')] p1206: connectstyle=Direct reliefconductorwidth=0.254 reliefentries=4 polygonreliefangle="90 Angle" airgapwidth=0.254
PolygonConnect Polygon_F.Cu-GND-5_ConnectDirect [IsNamedPolygon('F.Cu-GND-5')] p1207: connectstyle=Direct reliefconductorwidth=0.254 reliefentries=4 polygonreliefangle="90 Angle" airgapwidth=0.254
PolygonConnect Polygon_F.Cu-Net-(U13-REF)_ConnectDirect [IsNamedPolygon('F.Cu-Net-(U13-REF)')] p1208: connectstyle=Direct reliefconductorwidth=0.254 reliefentries=4 polygonreliefangle="90 Angle" airgapwidth=0.254
PolygonConnect Polygon_F.Cu-GND-4_ConnectDirect [IsNamedPolygon('F.Cu-GND-4')] p1209: connectstyle=Direct reliefconductorwidth=0.254 reliefentries=4 polygonreliefangle="90 Angle" airgapwidth=0.254
PolygonConnect "Polygon_F.Cu-/LattePanda Module/~{PWR_SW}_ConnectDirect" [IsNamedPolygon('F.Cu-/LattePanda Module/~{PWR_SW}')] p1210: connectstyle=Direct reliefconductorwidth=0.254 reliefentries=4 polygonreliefangle="90 Angle" airgapwidth=0.254
PolygonConnect Polygon_F.Cu-/GPIO/SOC_UART1_TX_ConnectDirect [IsNamedPolygon('F.Cu-/GPIO/SOC_UART1_TX')] p1211: connectstyle=Direct reliefconductorwidth=0.254 reliefentries=4 polygonreliefangle="90 Angle" airgapwidth=0.254
PolygonConnect Polygon_F.Cu-/~{WAKE}-2_ConnectDirect [IsNamedPolygon('F.Cu-/~{WAKE}-2')] p1212: connectstyle=Direct reliefconductorwidth=0.254 reliefentries=4 polygonreliefangle="90 Angle" airgapwidth=0.254
PolygonConnect "Polygon_F.Cu-/LattePanda Module/SUSCLK_WIFI_ConnectDirect" [IsNamedPolygon('F.Cu-/LattePanda Module/SUSCLK_WIFI')] p1213: connectstyle=Direct reliefconductorwidth=0.254 reliefentries=4 polygonreliefangle="90 Angle" airgapwidth=0.254
PolygonConnect Polygon_F.Cu-Net-(U16-FB)_ConnectDirect [IsNamedPolygon('F.Cu-Net-(U16-FB)')] p1214: connectstyle=Direct reliefconductorwidth=0.254 reliefentries=4 polygonreliefangle="90 Angle" airgapwidth=0.254
PolygonConnect Polygon_F.Cu-GND-3_ConnectDirect [IsNamedPolygon('F.Cu-GND-3')] p1215: connectstyle=Direct reliefconductorwidth=0.254 reliefentries=4 polygonreliefangle="90 Angle" airgapwidth=0.254
PolygonConnect Polygon_F.Cu-/HDMI/DDC_SDA_ConnectDirect [IsNamedPolygon('F.Cu-/HDMI/DDC_SDA')] p1216: connectstyle=Direct reliefconductorwidth=0.254 reliefentries=4 polygonreliefangle="90 Angle" airgapwidth=0.254
PolygonConnect "Polygon_F.Cu-/PCIe x4/PCIE30_TX0_P_ConnectDirect" [IsNamedPolygon('F.Cu-/PCIe x4/PCIE30_TX0_P')] p1217: connectstyle=Direct reliefconductorwidth=0.254 reliefentries=4 polygonreliefangle="90 Angle" airgapwidth=0.254
PolygonConnect Polygon_F.Cu-+1V0_ConnectDirect [IsNamedPolygon('F.Cu-+1V0')] p1218: connectstyle=Direct reliefconductorwidth=0.254 reliefentries=4 polygonreliefangle="90 Angle" airgapwidth=0.254
PolygonConnect "Polygon_F.Cu-/Gigabit Ethernet/MDI0-_ConnectDirect" [IsNamedPolygon('F.Cu-/Gigabit Ethernet/MDI0-')] p1219: connectstyle=Direct reliefconductorwidth=0.254 reliefentries=4 polygonreliefangle="90 Angle" airgapwidth=0.254
PolygonConnect Polygon_F.Cu-Net-(Q7-G)_ConnectDirect [IsNamedPolygon('F.Cu-Net-(Q7-G)')] p1220: connectstyle=Direct reliefconductorwidth=0.254 reliefentries=4 polygonreliefangle="90 Angle" airgapwidth=0.254
PolygonConnect Polygon_F.Cu-/HDMI/HPD_ConnectDirect [IsNamedPolygon('F.Cu-/HDMI/HPD')] p1221: connectstyle=Direct reliefconductorwidth=0.254 reliefentries=4 polygonreliefangle="90 Angle" airgapwidth=0.254
PolygonConnect Polygon_F.Cu-Net-(U14-VDD)_ConnectDirect [IsNamedPolygon('F.Cu-Net-(U14-VDD)')] p1222: connectstyle=Direct reliefconductorwidth=0.254 reliefentries=4 polygonreliefangle="90 Angle" airgapwidth=0.254
PolygonConnect Polygon_F.Cu-GND-2_ConnectDirect [IsNamedPolygon('F.Cu-GND-2')] p1223: connectstyle=Direct reliefconductorwidth=0.254 reliefentries=4 polygonreliefangle="90 Angle" airgapwidth=0.254
PolygonConnect Polygon_F.Cu-/HDMI/DDI_B_DDC_SDA_ConnectDirect [IsNamedPolygon('F.Cu-/HDMI/DDI_B_DDC_SDA')] p1224: connectstyle=Direct reliefconductorwidth=0.254 reliefentries=4 polygonreliefangle="90 Angle" airgapwidth=0.254
PolygonConnect Polygon_F.Cu-/~{WAKE}-1_ConnectDirect [IsNamedPolygon('F.Cu-/~{WAKE}-1')] p1225: connectstyle=Direct reliefconductorwidth=0.254 reliefentries=4 polygonreliefangle="90 Angle" airgapwidth=0.254
PolygonConnect Polygon_F.Cu-/GPIO/I2C5_SCL_ConnectDirect [IsNamedPolygon('F.Cu-/GPIO/I2C5_SCL')] p1226: connectstyle=Direct reliefconductorwidth=0.254 reliefentries=4 polygonreliefangle="90 Angle" airgapwidth=0.254
PolygonConnect Polygon_F.Cu-/~{WAKE}_ConnectDirect [IsNamedPolygon('F.Cu-/~{WAKE}')] p1227: connectstyle=Direct reliefconductorwidth=0.254 reliefentries=4 polygonreliefangle="90 Angle" airgapwidth=0.254
PolygonConnect Polygon_F.Cu-GND-1_ConnectDirect [IsNamedPolygon('F.Cu-GND-1')] p1228: connectstyle=Direct reliefconductorwidth=0.254 reliefentries=4 polygonreliefangle="90 Angle" airgapwidth=0.254
PolygonConnect "Polygon_F.Cu-/PCIe x4/PCIE30_TX2_N_ConnectDirect" [IsNamedPolygon('F.Cu-/PCIe x4/PCIE30_TX2_N')] p1229: connectstyle=Direct reliefconductorwidth=0.254 reliefentries=4 polygonreliefangle="90 Angle" airgapwidth=0.254
PolygonConnect Polygon_F.Cu-GND_ConnectDirect [IsNamedPolygon('F.Cu-GND')] p1230: connectstyle=Direct reliefconductorwidth=0.254 reliefentries=4 polygonreliefangle="90 Angle" airgapwidth=0.254
PolygonConnect "Polygon_F.Cu-/PCIe x4/PCIE30_TX3_P_ConnectDirect" [IsNamedPolygon('F.Cu-/PCIe x4/PCIE30_TX3_P')] p1231: connectstyle=Direct reliefconductorwidth=0.254 reliefentries=4 polygonreliefangle="90 Angle" airgapwidth=0.254
PolygonConnect Polygon_F.Cu-/~{PLT_RST}_ConnectDirect [IsNamedPolygon('F.Cu-/~{PLT_RST}')] p1232: connectstyle=Direct reliefconductorwidth=0.254 reliefentries=4 polygonreliefangle="90 Angle" airgapwidth=0.254
PolygonConnect Polygon_F.Cu-+3V3_ConnectDirect [IsNamedPolygon('F.Cu-+3V3')] p1233: connectstyle=Direct reliefconductorwidth=0.254 reliefentries=4 polygonreliefangle="90 Angle" airgapwidth=0.254
RoutingVias [All] p1: holewidth=0.711 width=1.27 viastyle="Through Hole" minholewidth=0.711 minwidth=1.27 maxholewidth=0.711 maxwidth=1.27
SilkToSilkClearance [All] p1: silktosilkclearance=0
SilkToSolderMaskClearance [IsPad] p1: minsilkscreentomaskgap=0 clearancetoexposedcopper=TRUE
SolderMaskExpansion [All] p1: expansion=0.102 istentingtop=FALSE
Width [All] p1: maxlimit=10 minlimit=0.254 preferedwidth=0.254 midlayer1_maxwidth=0.254 midlayer3_maxwidth=0.254 midlayer9_maxwidth=0.254 midlayer11_maxwidth=0.254 midlayer13_maxwidth=0.254 midlayer15_maxwidth=0.254 midlayer21_maxwidth=0.254 midlayer23_maxwidth=0.254 midlayer27_maxwidth=0.254 minimp=50.000000 maximp=50.000000 favimp=50.000000
27 further rules are at their usual default settings.

## Classes and differential pairs
pad class "Pad Class Clearance 0.25": FID1-Un1 FID2-Un1

## Components (designator, comment, footprint, x,y, rotation, side; value= is the part's Value field where it differs from the comment)
A1 "Comment" LattePanda_Module_H8.0mm_Horizontal -38.79,36.86 r180 top value=LattePanda_Mu
BT1 "Comment" Battery_Holder_CR1220_S8411-45R -115.81,82.07 r270 top value=Battery_Cell
C1 "Comment" C_0402_1005Metric -125.79,37.51 r180 top value=220nF/50V
C2 "Comment" C_0402_1005Metric -125.79,36.58 r180 top value=220nF/50V
C3 "Comment" C_0402_1005Metric -125.79,33.5 r180 top value=220nF/50V
C4 "Comment" C_0402_1005Metric -125.79,32.57 r180 top value=220nF/50V
C5 "Comment" C_0402_1005Metric -125.8,29.517 r180 top value=220nF/50V
C6 "Comment" C_0402_1005Metric -125.8,28.59 r180 top value=220nF/50V
C7 "Comment" C_0402_1005Metric -125.8,25.52 r180 top value=220nF/50V
C8 "Comment" C_0402_1005Metric -125.8,24.59 r180 top value=220nF/50V
C9 "Comment" C_0402_1005Metric -130.64,62.3 r90 top value=100nF/50V
C10 "Comment" C_0402_1005Metric -129.68,62.3 r90 top value=100nF/50V
C11 "Comment" CP_Elec_6.3x7.7 -124.22,61.26 r0 top value=100uF/25V
C12 "Comment" CP_Elec_6.3x7.7 -124.22,53.95 r0 top value=100uF/25V
C13 "Comment" C_0402_1005Metric -125.74,40.503 r180 top value=100nF/50V
C14 "Comment" C_0402_1005Metric -125.74,41.43 r180 top value=10uF/10V
C15 "Comment" C_0402_1005Metric -125.74,42.35 r0 top value=100nF/50V
C16 "Comment" CP_Elec_6.3x7.7 -124.26,46.68 r0 top value=560uF/25V
C17 "Comment" C_0402_1005Metric -39.475,18.69 r270 top value=100nF/50V
C18 "Comment" C_0402_1005Metric -40.395,18.69 r270 top value=100nF/50V
C19 "Comment" C_0402_1005Metric -41.975,18.69 r270 top value=100nF/50V
C20 "Comment" C_0402_1005Metric -42.895,18.69 r270 top value=100nF/50V
C21 "Comment" C_0402_1005Metric -44.482,18.69 r270 top value=100nF/50V
C22 "Comment" C_0402_1005Metric -45.402,18.69 r270 top value=100nF/50V
C23 "Comment" C_0402_1005Metric -46.974,18.69 r270 top value=100nF/50V
C24 "Comment" C_0402_1005Metric -47.894,18.69 r270 top value=100nF/50V
C25 "Comment" C_0402_1005Metric -53.985,9.4 r180 top value=100nF/50V
C26 "Comment" C_0402_1005Metric -119.842,20.012 r270 top value=100nF/50V
C27 "Comment" C_0402_1005Metric -120.762,20.012 r270 top value=100nF/50V
C28 "Comment" C_0402_1005Metric -117.36,19.56 r180 top value=100nF/50V
C29 "Comment" C_0402_1005Metric -117.36,20.48 r180 top value=100nF/50V
C30 "Comment" C_0603_1608Metric -68.04,18.14 r180 top value=22uF/10V
C31 "Comment" C_0603_1608Metric -124.19,19.62 r270 top value=22uF/10V
C32 "Comment" C_0603_1608Metric -122.73,19.61 r270 top value=22uF/10V
C33 "Comment" C_0402_1005Metric -93.275,34.81 r270 top value=100nF/50V
C34 "Comment" C_0402_1005Metric -96.695,27.6 r90 top value=100nF/50V
C35 "Comment" C_0402_1005Metric -93.52,25.29 r90 top value=100nF/50V
C36 "Comment" C_0402_1005Metric -90.735,25.29 r90 top value=100nF/50V
C37 "Comment" C_0402_1005Metric -88.1,28.39 r180 top value=100nF/50V
C38 "Comment" C_0402_1005Metric -87.11,30.96 r0 top value=100nF/50V
C39 "Comment" C_0402_1005Metric -90.455,34.8 r90 top value=100nF/50V
C40 "Comment" C_0402_1005Metric -96.075,34.84 r270 top value=100nF/50V
C41 "Comment" C_0402_1005Metric -95.4,25.48 r90 top value=100nF/50V
C42 "Comment" C_0402_1005Metric -87.11,30.037 r0 top value=100nF/50V
C43 "Comment" C_0402_1005Metric -89.535,34.8 r90 top value=100nF/50V
C44 "Comment" C_0402_1005Metric -95.145,34.83 r270 top value=10uF/10V
C45 "Comment" C_0402_1005Metric -94.205,34.82 r270 top value=100nF/50V
C46 "Comment" C_0402_1005Metric -98.435,26.98 r0 top value=12pF/50V
C47 "Comment" C_0402_1005Metric -98.445,32.1 r0 top value=12pF/50V
C48 "Comment" C_0402_1005Metric -96.97,20.03 r90 top value=100nF/50V
C49 "Comment" C_0402_1005Metric -105.82,44.45 r180 top value=220nF/50V
C50 "Comment" C_0402_1005Metric -105.82,43.51 r180 top value=220nF/50V
C51 "Comment" C_0402_1005Metric -105.85,46.5 r180 top value=10uF/10V
C52 "Comment" C_0402_1005Metric -105.85,47.43 r180 top value=100nF/50V
C53 "Comment" C_0402_1005Metric -105.81,28.4 r180 top value=10uF/10V
C54 "Comment" C_0402_1005Metric -105.81,29.32 r180 top value=100nF/50V
C55 "Comment" C_0402_1005Metric -105.82,58.22 r180 top value=220nF/50V
C56 "Comment" C_0402_1005Metric -105.82,59.15 r180 top value=220nF/50V
C57 "Comment" C_0402_1005Metric -105.82,52.33 r180 top value=10uF/10V
C58 "Comment" C_0402_1005Metric -105.82,53.26 r180 top value=100nF/50V
C59 "Comment" C_0402_1005Metric -105.82,70.27 r180 top value=10uF/10V
C60 "Comment" C_0402_1005Metric -105.82,71.19 r180 top value=100nF/50V
C61 "Comment" C_0402_1005Metric -13.74,7.95 r270 top value=1uF/16V
C62 "Comment" C_0402_1005Metric -34.13,4.663 r180 top value=1uF/16V
C63 "Comment" C_0402_1005Metric -32.29,7.562 r180 top value=1uF/16V
C64 "Comment" C_0603_1608Metric -26.03,18.87 r90 top value=22uF/10V
C65 "Comment" C_0603_1608Metric -10.67,26.53 r90 top value=22uF/10V
C66 "Comment" C_0402_1005Metric -125.908,90.31 r0 top value=1uF/16V
C67 "Comment" C_0603_1608Metric -27.49,18.86 r90 top value=22uF/10V
C68 "Comment" C_0603_1608Metric -9.2,26.53 r90 top value=22uF/10V
C69 "Comment" C_0402_1005Metric -106.13,89.05 r270 top value=1uF/16V
C70 "Comment" C_0402_1005Metric -21.66,16.09 r90 top value=100nF/50V
C71 "Comment" C_0402_1005Metric -4.83,23.87 r90 top value=100nF/50V
C72 "Comment" C_0402_1005Metric -21.48,21.72 r270 top value=12pF/50V
C73 "Comment" C_0402_1005Metric -3.27,27.75 r180 top value=12pF/50V
C74 "Comment" C_0603_1608Metric -28.95,15.78 r270 top value=22uF/10V
C75 "Comment" C_0603_1608Metric -12.13,23.46 r270 top value=22uF/10V
C76 "Comment" C_0603_1608Metric -30.41,15.77 r270 top value=22uF/10V
C77 "Comment" C_0603_1608Metric -15.07,23.47 r270 top value=22uF/10V
C78 "Comment" C_0402_1005Metric -33.14,16.32 r90 top value=100nF/50V
C79 "Comment" C_0402_1005Metric -16.29,24.06 r90 top value=100nF/50V
C80 "Comment" C_0603_1608Metric -31.92,15.76 r270 top value=22uF/10V
C81 "Comment" C_0603_1608Metric -10.67,23.445 r270 top value=22uF/10V
C82 "Comment" C_0603_1608Metric -27.49,15.78 r270 top value=22uF/10V
C83 "Comment" C_0603_1608Metric -13.59,23.46 r270 top value=22uF/10V
C84 "Comment" C_0402_1005Metric -88.87,81.56 r90 top value=100nF/50V
D1 "Comment" D_0402_1005Metric -49.538,16.651 r90 top value=ESD5V0B03
D2 "Comment" D_0402_1005Metric -52.49,16.638 r270 top value=ESD5V0B03
D3 "Comment" D_0402_1005Metric -49.885,9.88 r90 top value=ESD5V0B03
D4 "Comment" D_SOD-323 -54.285,12.71 r180 top value=1N5819WS
D5 "Comment" D_0402_1005Metric -116.48,16.202 r90 top value=ESD5V0B03
D6 "Comment" D_0402_1005Metric -116.48,18.065 r270 top value=ESD5V0B03
D7 "Comment" D_0402_1005Metric -107.07,13.18 r0 top value=ESD5V0B03
D8 "Comment" D_0402_1005Metric -105.21,13.18 r180 top value=ESD5V0B03
D9 "Comment" LED_0603_1608Metric -114.15,24.48 r0 top value=LED_G
D10 "Comment" D_0402_1005Metric -11.94,6.09 r0 top value=ESD5V0B03
D11 "Comment" D_0402_1005Metric -10.07,6.09 r180 top value=ESD5V0B03
D12 "Comment" D_0402_1005Metric -7.4,6.32 r90 top value=PESD24VS1UL-N
D13 "Comment" D_0402_1005Metric -14.37,6.09 r180 top value=PESD24VS1UL-N
D14 "Comment" D_0402_1005Metric -8.345,6.315 r90 top value=PESD24VS1UL-N
D15 "Comment" D_SMA -17.58,10.75 r180 top value=SS54
D16 "Comment" D_SMA -17.58,14.38 r180 top value=SS54
D17 "Comment" D_SMA -17.58,17.88 r180 top value=SS54
D18 "Comment" D_SMA -3.393,8.92 r180 top value=SS54
D19 "Comment" D_SMA -3.413,12.44 r180 top value=SS54
D20 "Comment" D_SMA -3.415,15.94 r180 top value=SS54
D21 "Comment" D_0402_1005Metric -125.9,89.38 r180 top value=ESD5V0B03
D22 "Comment" LED_0603_1608Metric -132.19,94.39 r90 top value=LED_G
D23 "Comment" LED_0603_1608Metric -123.66,66.08 r180 top value=LED_G
D24 "Comment" D_SOD-323 -12.94,45.31 r270 top value="3V3 Izt=5mA"
D25 "Comment" D_0402_1005Metric -107.06,89.07 r90 top value=ESD5V0B03
D26 "Comment" D_SOD-323 -86.61,81.59 r0 top value=1N5819WS
F1 "Comment" R_0603_1608Metric -54.285,10.9 r180 top value=6V/50mA
F2 "Comment" Fuse_0805_2012Metric -67.53,15.72 r270 top value=6V/1A
F3 "Comment" Fuse_0805_2012Metric -69.44,15.73 r270 top value=6V/1A
F4 "Comment" R_0805_2012Metric -124.63,16.43 r270 top value=6V/2A
F5 "Comment" Fuse_0805_2012Metric -122.7,16.42 r270 top value=6V/2A
FID1 "Comment" Fiducial_0.5mm_Mask1mm -138.51,89.76 r0 top value=Fiducial
FID2 "Comment" Fiducial_0.5mm_Mask1mm 2.45,3.94 r0 top value=Fiducial
H1 "Comment" MountingHole_3.2mm_M3_Pad_Via 0,95 r0 top value=MountingHole_Pad
H2 "Comment" MountingHole_3.2mm_M3_Pad_Via -139,95 r0 top value=MountingHole_Pad
H3 "Comment" MountingHole_3.2mm_M3_Pad_Via -139.5,0 r0 top value=MountingHole_Pad
H4 "Comment" MountingHole_3.2mm_M3_Pad_Via 0,0 r0 top value=MountingHole_Pad
H5 "Comment" MountingHole_3mm_M2_Pad_TopOnly -6.99,93.86 r180 top value=MountingHole_Pad
H6 "Comment" MountingHole_3mm_M2_Pad_TopOnly -70.59,93.86 r180 top value=MountingHole_Pad
H7 "Comment" MountingHole_2.7mm_M2_Pad_TopOnly -83.22,61.76 r90 top value=MountingHole_M2.0
H8 "Comment" MountingHole_2.7mm_M2_Pad_TopOnly -82.92,37.28 r90 top value=MountingHole_M2.0
J1 "Comment" PinHeader_1x03_P2.54mm_Vertical -99.85,76.82 r90 top value=Conn_01x03_Pin
J2 "Comment" PCIe_x4_Gen3Slot_Connectors -133.5,53.05 r270 top value=Bus_PCI_Express_x4
J3 "Comment" HDMI_A_Molex_208658-1001_Horizontal -45.43,3.52 r270 top value=HDMI_A
J4 "Comment" USB3_A_Molex_48406-0001_Horizontal_Stacked -121.8,6.95 r0 top value=USB3_A_Stacked
J5 "Comment" USB_A_CUI_UJ2-ADH-TH_Horizontal_Stacked -69,8.762 r90 top value=USB_A_Stacked
J6 "Comment" RJ45_UDE_RB1-125B8G1A -99.105,15.4 r0 top value=RJ45_RB1-125B8G1A
J7 "Comment" PinHeader_1x04_P2.54mm_Vertical -77.95,88.22 r270 top value=Conn_01x04_Pin
J8 "Comment" PinHeader_1x03_P2.54mm_Vertical -99.88,88.21 r90 top value=Conn_01x03_Pin
J9 "Comment" PinHeader_1x04_P2.54mm_Vertical -77.95,90.76 r270 top value=Conn_01x04_Pin
J10 "Comment" PinHeader_1x03_P2.54mm_Vertical -99.88,90.75 r90 top value=Conn_01x03_Pin
J11 "Comment" PinHeader_1x03_P2.54mm_Vertical -99.88,93.29 r90 top value=Conn_01x03_Pin
J12 "Comment" PinHeader_1x04_P2.54mm_Vertical -77.96,93.3 r270 top value=Conn_01x04_Pin
J13 "Comment" PinHeader_1x04_P2.54mm_Vertical -77.96,95.84 r270 top value=Conn_01x04_Pin
J14 "Comment" PinHeader_1x03_P2.54mm_Vertical -99.88,95.83 r90 top value=Conn_01x03_Pin
J15 "Comment" PCIe_M.2_Connectors_P=0.5mm_H=4.2mm_KeyM -112.895,37.28 r90 top value=Bus_M.2_Socket_M
J16 "Comment" PCIe_M.2_Connectors_P=0.5mm_H=4.2mm_KeyE -116.77,52.51 r90 top value=Bus_M.2_Socket_E
J17 "Comment" DC_Jack_DC007B_30V_10A -23.55,-4.89 r180 top value=Barrel_Jack_Switch
J18 "Comment" USB_C_Receptacle_G-Switch_GT-USB-7010ASV -10.69,-0.77 r0 top value=USB_C_Receptacle_USB2.0
JP1 "Comment" PinHeader_1x03_P2.54mm_Vertical -76.07,16.16 r270 top value=Jumper_3_Bridged12
L1 "Comment" L_Sunlord_SWPA4020S -24.44,15.02 r180 top value=2.2uH/4.3A
L2 "Comment" L_Sunlord_SWPA4020S -7.59,22.7 r180 top value=2.2uH/4.3A
M1 "Comment" JST_PH_B4B-PH-K_1x04_P2.00mm_Vertical -89.55,78.29 r0 top value=Fan_4pin
Q1 "Comment" SOT-23 -53.97,19.507 r270 top value=2N7002
Q2 "Comment" SOT-23 -50.56,19.51 r270 top value=2SK3018
Q3 "Comment" SOT-23 -50.835,12.75 r270 top value=2SK3018
Q4 "Comment" SOT-23 -57.418,19.5 r270 top value=2SK3018
Q5 "Comment" SOT-23 -31.51,4.24 r90 top value=2N7002
Q6 "Comment" SOT-23 -31.51,0.382 r90 top value=2N7002
Q7 "Comment" MOSFET_PDFN8_3.3x3.3 -32.32,10.675 r90 top value=NCE30P28Q
Q8 "Comment" SOT-23 -129.083,89.01 r0 top value=2N7002
R1 "Comment" R_0402_1005Metric#1 -106.69,78.31 r180 top value=1K/1%
R2 "Comment" R_0402_1005Metric#1 -41.92,45.19 r90 top value=10K/1%
R3 "Comment" R_0402_1005Metric#1 -52.065,9.872 r90 top value=2.2K/1%
R4 "Comment" R_0402_1005Metric#1 -55.36,16.618 r90 top value=1M/1%
R5 "Comment" R_0402_1005Metric#1 -51.5,16.64 r90 top value=2.2K/1%
R6 "Comment" R_0402_1005Metric#1 -54.39,16.608 r270 top value=21.5K/1%
R7 "Comment" R_0402_1005Metric#1 -48.185,14.94 r90 top value=470R/1%
R8 "Comment" R_0402_1005Metric#1 -46.685,14.94 r90 top value=470R/1%
R9 "Comment" R_0402_1005Metric#1 -45.685,14.94 r90 top value=470R/1%
R10 "Comment" R_0402_1005Metric#1 -44.185,14.94 r90 top value=470R/1%
R11 "Comment" R_0402_1005Metric#1 -53.44,16.628 r270 top value=1K/1%
R13 "Comment" R_0402_1005Metric#1 -43.185,14.94 r90 top value=470R/1%
R14 "Comment" R_0402_1005Metric#1 -41.685,14.94 r90 top value=470R/1%
R15 "Comment" R_0402_1005Metric#1 -50.485,16.65 r90 top value=2.2K/1%
R16 "Comment" R_0402_1005Metric#1 -40.685,14.94 r90 top value=470R/1%
R17 "Comment" R_0402_1005Metric#1 -39.185,14.94 r90 top value=470R/1%
R18 "Comment" R_0402_1005Metric#1 -50.965,9.88 r90 top value=2.2K/1%
R19 "Comment" R_0402_1005Metric#1 -58.65,16.64 r90 top value=2.2K/1%
R20 "Comment" R_0402_1005Metric#1 -91.385,34.83 r270 top value=10K/1%
R21 "Comment" R_0402_1005Metric#1 -92.335,34.82 r270 top value=10K/1%
R22 "Comment" R_0603_1608Metric -99.035,25.7 r0 top value=2.49K/1%
R23 "Comment" R_0402_1005Metric#1 -96.88,29.71 r90 top value=1M/1%
R24 "Comment" R_0402_1005Metric#1 -98.09,20.01 r90 top value=470R/1%
R25 "Comment" R_0402_1005Metric#1 -88.57,20.05 r90 top value=470R/1%
R27 "Comment" R_0402_1005Metric#1 -105.83,39.82 r0 top value=0R/1%
R29 "Comment" R_0402_1005Metric#1 -105.83,45.4 r0 top value=0R/1%
R30 "Comment" R_0402_1005Metric#1 -110.2,24.49 r0 top value=2.2K/1%
R32 "Comment" R_0402_1005Metric#1 -105.82,63.88 r0 top value=0R/1%
R33 "Comment" R_0402_1005Metric#1 -105.82,64.84 r0 top value=0R/1%
R34 "Comment" R_0402_1005Metric#1 -105.82,66.73 r0 top value=10K/1%
R35 "Comment" R_0402_1005Metric#1 -105.82,65.79 r180 top value=10K/1%
R36 "Comment" R_0402_1005Metric#1 -10.74,16.51 r270 top value=10K/1%
R37 "Comment" R_0402_1005Metric#1 -12.77,7.93 r90 top value=1K/1%
R38 "Comment" R_0402_1005Metric#1 -34.15,2.772 r180 top value=10K/1%
R39 "Comment" R_0402_1005Metric#1 -34.15,3.722 r0 top value=2.2K/1%
R40 "Comment" R_0402_1005Metric#1 -34.15,7.522 r0 top value=10K/1%
R41 "Comment" R_0402_1005Metric#1 -34.15,6.542 r180 top value=21.5K/1%
R42 "Comment" R_0402_1005Metric#1 -34.15,5.603 r0 top value=21.5K/1%
R43 "Comment" R_0402_1005Metric#1 -11.74,16.5 r90 top value=56K/1%
R44 "Comment" R_0402_1005Metric#1 -32.29,6.632 r180 top value=100K/1%
R45 "Comment" R_0402_1005Metric#1 -30.82,7.103 r90 top value=100K/1%
R46 "Comment" R_0402_1005Metric#1 -78.93,11.7 r270 top value=100R/1%
R47 "Comment" R_0402_1005Metric#1 -132.23,87.78 r180 top value=1K/1%
R48 "Comment" R_0402_1005Metric#1 -125.9,88.44 r0 top value=100R/1%
R49 "Comment" R_0402_1005Metric#1 -132.23,89.04 r0 top value=10K/1%
R50 "Comment" R_0402_1005Metric#2 -125.91,87.5 r0 top value=10K/1%
R51 "Comment" R_0402_1005Metric#1 -77.98,11.7 r270 top value=100K/1%
R52 "Comment" R_0402_1005Metric#1 -132.2,90.24 r0 top value=2.2K/1%
R53 "Comment" R_0402_1005Metric#1 -11.23,45.19 r90 top value=2.2K/1%
R54 "Comment" R_0402_1005Metric#1 -126.6,66.1 r0 top value=21.5K/1%
R55 "Comment" R_0402_1005Metric#1 -108,89.08 r270 top value=100R/1%
R56 "Comment" R_0402_1005Metric#2 -108.96,89.1 r270 top value=10K/1%
R57 "Comment" R_0402_1005Metric#1 -22.42,21.72 r90 top value=75K/1%
R58 "Comment" R_0402_1005Metric#1 -20.54,21.72 r270 top value=10K/1%
R59 "Comment" R_0402_1005Metric#1 -3.27,28.72 r0 top value=21.5K/1%
R60 "Comment" R_0402_1005Metric#1 -3.28,26.8 r180 top value=4.7K/1%
R64 "Comment" R_0402_1005Metric#2 -79.6,74.93 r90 top value=4.7K/1%
R66 "Comment" R_0402_1005Metric#2 -88.87,83.58 r90 top value=21.5K/1%
R68 "Comment" R_0402_1005Metric#1 -87.82,83.58 r270 top value=21.5K/1%
R69 "Comment" R_0402_1005Metric#1 -80.55,74.93 r270 top value=100R/1%
R72 "Comment" R_0402_1005Metric#1 -86.79,83.58 r90 top value=4.7K/1%
R76 "Comment" R_0402_1005Metric#1 -22.775,45.181 r90 top value=100K/1%
R77 "Comment" R_0402_1005Metric#1 -24.604,45.19 r90 top value=100K/1%
R78 "Comment" R_0402_1005Metric#2 -46.695,45.19 r90 top value=10K/1%
R79 "Comment" R_0402_1005Metric#2 -47.635,45.19 r90 top value=10K/1%
SW1 "Comment" SW_Push_6x6x6 -124.1,94.59 r180 top value=SW_Push
SW2 "Comment" SW_Push_6x6x6 -111.05,94.59 r180 top value=SW_Push
TP1 "Comment" TestPoint_Pad_D1.5mm#1 -49.86,29.48 r90 top value=TestPoint
TP2 "Comment" TestPoint_Pad_D1.5mm#1 -104.38,38.25 r90 top value=TestPoint
TP3 "Comment" TestPoint_Pad_D1.5mm#2 -4,5 r180 top value=TestPoint
TP4 "Comment" TestPoint_Pad_D1.5mm#2 -23.78,10 r180 top value=TestPoint
TP5 "Comment" TestPoint_Pad_D1.5mm#2 -36.6,17 r180 top value=TestPoint
TP6 "Comment" TestPoint_Pad_D1.5mm#2 -17.86,28 r180 top value=TestPoint
TP7 "Comment" TestPoint_Pad_D1.5mm#2 -40.6,38.88 r180 top value=TestPoint
TP8 "Comment" TestPoint_Pad_D1.5mm#2 -35,24 r180 top value=TestPoint
TP9 "Comment" TestPoint_Pad_D1.5mm#2 -78,6 r180 top value=TestPoint
TP10 "Comment" TestPoint_Pad_D1.5mm#2 -1,5 r180 top value=TestPoint
TP11 "Comment" TestPoint_Pad_D1.5mm#2 -86.61,81.59 r180 top value=TestPoint
TP12 "Comment" TestPoint_Pad_D1.5mm#2 -79,76 r180 top value=TestPoint